# EAGLE board v0.0 (EAGLE 5.11)
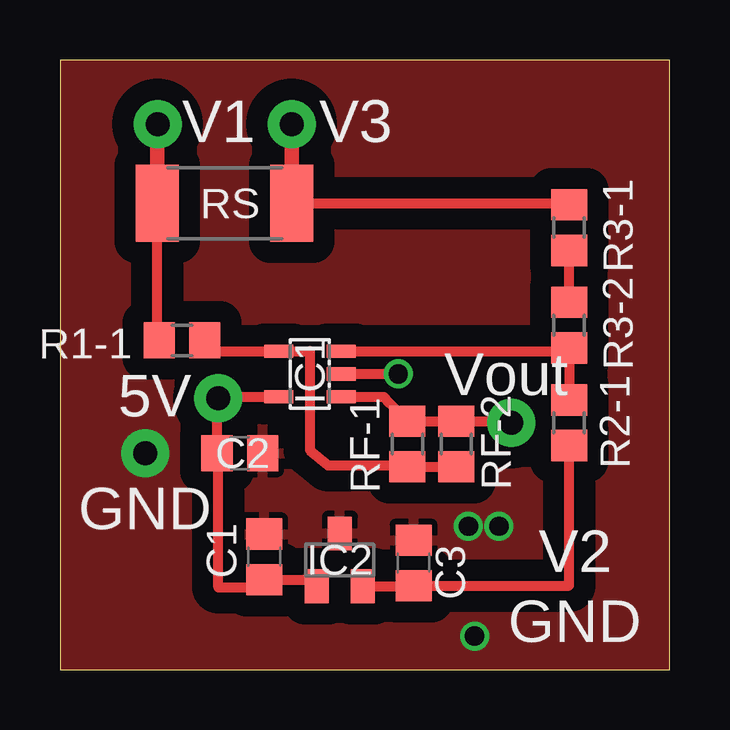
[diagram p0: board, top side]
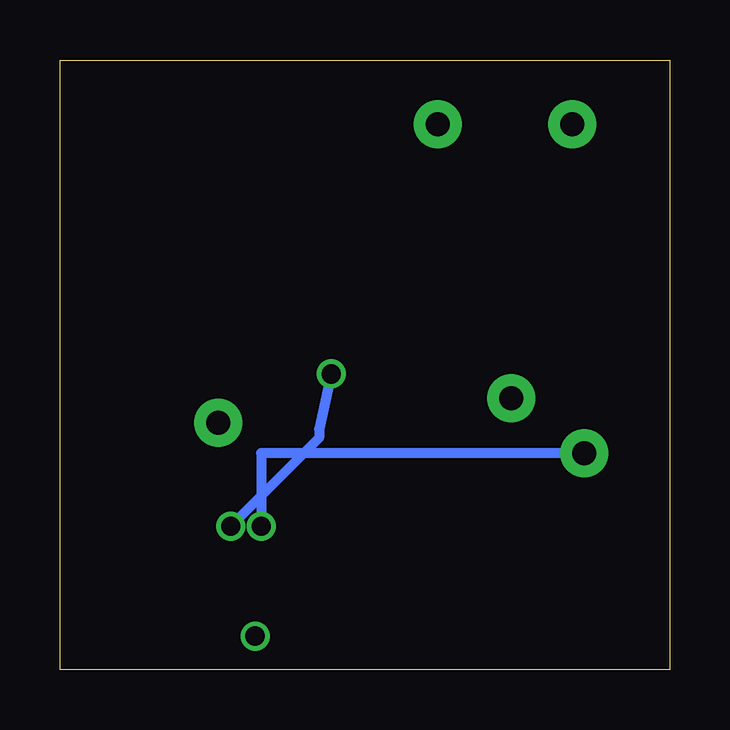
[diagram p1: board, bottom side, seen from below]

Size 25.4 x 25.4 mm. Coordinates in mm from the lower left corner, seen from the top.
Outline: 0,0 25.4,0 25.4,25.4 0,25.4 0,0
Copper layers (1*16): Top 0.035mm / dielectric 1.5mm / Bottom 0.035mm
Design rules "default *": minimum track width 10mil, minimum drill 24mil, track to track 35mil, track to pad 35mil, pad to pad 35mil, via to via 35mil, smd to smd 35mil, copper to edge 1mil, drill to drill 1mil, minimum pad ring 10mil, minimum via ring 8mil, stop-mask expansion 4mil, vias tented up to drill 0mil, thermal gap 10mil

## Footprints (pad centres in the part's own frame; a part is rotated, then mirrored left to right if it is on the bottom)
C0805 = smd 1.3 x 1.5: 1 -0.95,0; 2 0.95,0
SOT-23-5L = smd 0.55 x 1.2: 1 -2.22,-1.3; 2 -1.27,-1.3; 3 -0.32,-1.3; 4 -0.32,1.3; 5 -2.22,1.3
SOT23 = smd 1 x 1.4: 1 -0.85,-1.1; 2 1.05,-1.1; 3 0.1,1.1
R0805 = smd 1.3 x 1.5: 1 -0.95,0; 2 0.95,0
R2512 = smd 1.8 x 3.2: 1 -2.8,0; 2 2.8,0

## Placement (x,y rotation side)
C1  0.1u  [C0805]  8.51,4.7 90 top
C2  0.1u  [C0805]  7.49,9.02 0 top
C3  10u  [C0805]  14.73,4.45 90 top
IC1  MCP6001  [SOT-23-5L]  10.41,13.59 90 top
IC2  MCP1525  [SOT23]  11.56,4.57 0 top
R1-1  1k  [R0805]  5.08,13.72 0 top
R2-1  30k  [R0805]  21.21,10.29 90 top
R3-1  3k  [R0805]  21.21,18.41 270 top
R3-2  3k  [R0805]  21.21,14.35 270 top
RF-1  10k  [R0805]  14.48,9.4 90 top
RF-2  10k  [R0805]  16.51,9.4 90 top
RS  1  [R2512]  6.86,19.43 0 top

## Library data of the parts
C1-C3 R1-1 R2-1 R3-1 R3-2 RF-1 RF-2 RS = rcl
IC1 IC2 = Alan Rosenthal

## Nets
+5V: C1.1 C2.1 IC1.5 IC2.1
N$1: IC1.3 R2-1.2 R3-2.2
N$6: R3-1.2 R3-2.1
N$9: IC1.4 R1-1.2 RF-1.1 RF-2.1
PE: C1.2 C2.2 C3.2 IC1.2 IC2.3
V1: R1-1.1 RS.1
V2: C3.1 IC2.2 R2-1.1
V3: R3-1.1 RS.2
VOUT: IC1.1 RF-1.2 RF-2.2

## Tracks (layer width: path | path; a pad name or v marks a point on that pad's centre or on a via)
+5V  (via drill 1 pad 2)
  Top 0.406: IC1.5 6.6,11.37 v6.6,11.3 6.54,11.3 C2.1 6.6,9.02 6.6,3.43 8.51,3.43 C1.1 10.2,3.75 IC2.1
N$1
  Top 0.406: R2-1.2 R3-2.2 21.08,13.27 IC1.3
N$6
  Top 0.406: R3-2.1 R3-1.2
N$9
  Top 0.406: RF-2.1 RF-1.1 14.42,8.51 11.18,8.51 10.41,9.14 10.41,13.27 IC1.4 6.03,13.27 R1-1.2
PE  (via drill 0.8, 1 pad 2)
  Top 0.406: IC1.2 v14.1,12.32
  Bottom 0.406: v18.29,5.97 14.61,9.65 14.61,10.03 v14.1,12.32 | v3.56,9.02 17.02,9.02 v17.02,5.97
  other vias: 17.27,1.4
  pour Top: -2.16,-0.89 26.29,-1.52 26.67,26.29 -2.03,27.69
V1  (via drill 1 pad 2)
  Top 0.406: 4.06,22.61 v4.06,22.73 | RS.1 4.06,13.72 R1-1.1
  Top 0.61: RS.1 4.06,22.61
V2
  Top 0.406: IC2.2 14.73,3.47 C3.1 21.21,3.5 R2-1.1
V3  (via drill 1 pad 2)
  Top 0.406: v9.66,22.73 v9.65,22.73 | RS.2 21.14,19.43 R3-1.1
  Top 0.61: RS.2 v9.66,22.73
VOUT  (via drill 1 pad 2)
  Top 0.406: IC1.1 13.5,11.36 13.72,11.11 RF-1.2 RF-2.2 18.48,10.35 v18.8,10.29

## Text on the board
tNames: V1 | V3 | 5V | Vout | GND | V2 | GND